# Altium PCB start.PcbDoc
Units mm, origin at the board's own origin, x right, y up, seen from the top; angles counter-clockwise.
Board outline 152.4 x 101.6 mm, 2 copper layers (Top Layer, Bottom Layer); 8 components, 8 nets, 22 pads, 0 vias.
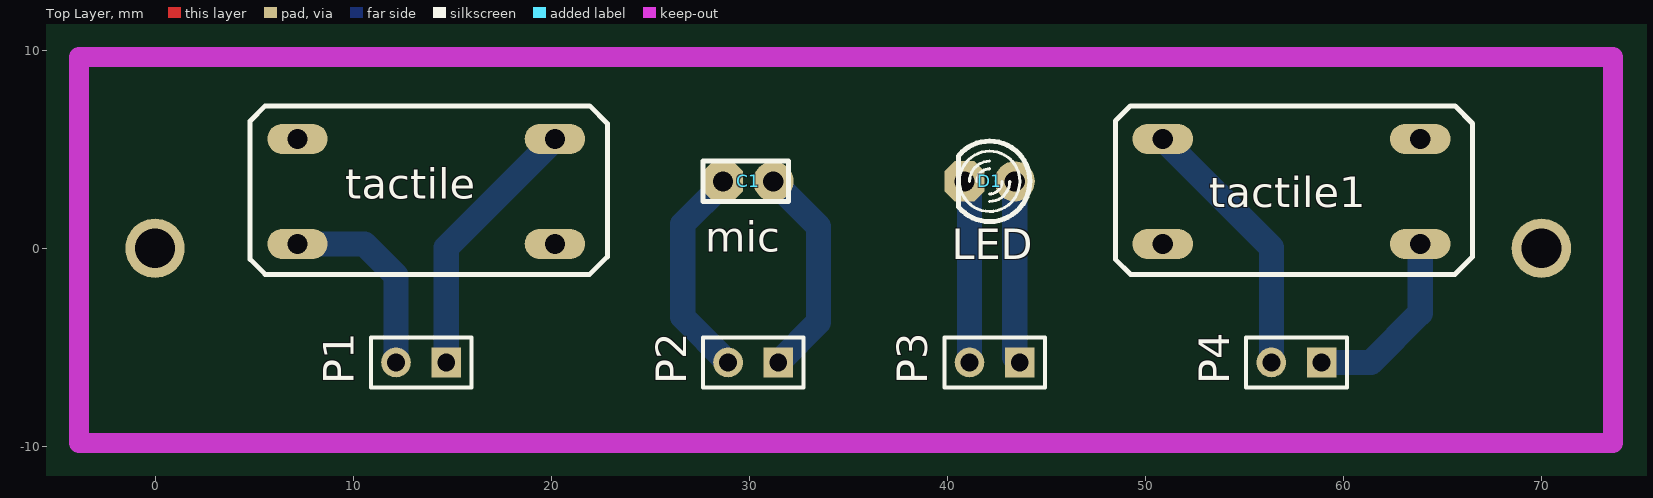
[diagram p0: Top Layer view]
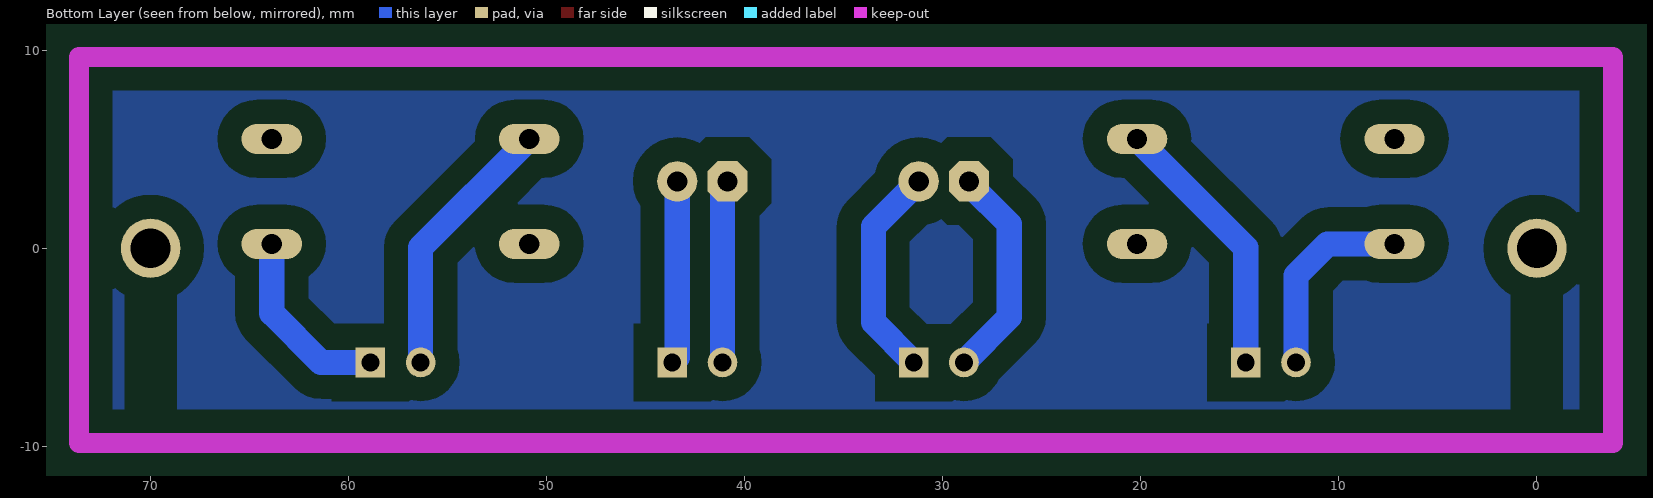
[diagram p1: Bottom Layer view, seen from below]

## Layer stack, top to bottom
Top Layer: signal copper 0.0356
Dielectric: dielectric 0.32, FR-4, Dk 4.8
Bottom Layer: signal copper 0.0356

## Board outline
-12.217,-62.154 140.183,-62.154 140.183,39.446 -12.217,39.446

## Design rules (kind name [scope] priority, off if disabled: settings)
Clearance [All] p1: gap=0.4
PolygonConnect [All] p1: connectstyle=Relief reliefconductorwidth=0.254 reliefentries=4 polygonreliefangle="90 Angle"
RoutingVias [All] p1: holewidth=0.711 width=1.27 viastyle="Through Hole" minholewidth=0.711 minwidth=1.27 maxholewidth=0.711 maxwidth=1.27
SilkscreenOverComponentPads [All] p1: minsilkscreentomaskgap=0.254
SolderMaskExpansion [All] p1: expansion=0.102
Width [All] p1: maxlimit=3 minlimit=0.508 preferedwidth=0.508
27 further rules are at their usual default settings.

## Components (designator, comment, footprint, x,y, rotation, side; value= is the part's Value field where it differs from the comment)
C1 "mic" My_cap100n 29.947,3.378 r0 top
D1 "LED" My_LED3MM 42.139,3.378 r180 top
P1 "Start" HDR1X2 14.707,-5.766 r180 top
P2 "Header 2" HDR1X2 31.471,-5.766 r180 top
P3 "Get_Fire" HDR1X2 43.663,-5.766 r180 top
P4 "Stop" HDR1X2 58.903,-5.766 r180 top
tactile "tactile" tactile 13.691,2.87 r180 top (schematic designator *)
tactile1 "tactile" tactile 57.379,2.87 r180 top (schematic designator *)

## Footprints (in the part's own frame and the unit in brackets; to place one, negate y for a bottom-side part, rotate by r counter-clockwise, add the part's x,y. Pads: shape width x height; smd on the part's side, far side on the other; paste and mask are expansions set on the pad)
HDR1X2 [mm] "Connector; Header; 2 Position"
  rect 1.5x1.5 hole 0.9: 1(0,0)
  round 1.5 hole 0.9: 2(2.54,0)
  silkscreen extent -1.27,-1.27 3.81,1.27
My_cap100n [mil]
  oct 80x80 hole 40: 1(-50,0)
  round 80 hole 40: 2(50,0)
  silkscreen extent -90,-40 80,40
My_LED3MM [mil]
  round 80 hole 40: A(-50,0)
  oct 80x80 hole 40: K(50,0)
  silkscreen extent -80,-80 62,80
tactile [mil]
  oval 120x60 hole 40: 1(-255.91,104.33) 1(255.91,104.33) 2(-255.91,-104.33) 2(255.91,-104.33)
  silkscreen extent -360,-170 350,165

## Part data
C1: library part "Cap ceramic", "CAP-100Nf"
D1: "Typical INFRARED GaAs LED"
P1 P3 P4: library part "Header 2", "Header, 2-Pin"
P2: "Header, 2-Pin"

## Free pads (board coordinates)
  round 3 hole 2: 0(0,0) 1(70,0)

## Nets (pads, with @x,y where several pads share a name; then routed paths per layer and width w, separated by ;. In a path a pad name is that pad's centre, name@x,y a point inside that pad or via, vN(x,y) a via of type N, cw(c..) or ccw(c..) an arc to the next point about the centre after c; other vN are vias at no path point)
Net*_1: P1.1 tactile.2@20.191,5.52 | length 13.6
  Bottom Layer w1.27: P1.1 14.707,0.036 tactile.2@20.191,5.52
Net*_2: P1.2 tactile.1@7.191,0.22 | length 10
  Bottom Layer w1.27: tactile.1@7.191,0.22 10.575,0.22 12.167,-1.372 P1.2
NetC1_1: C1.1 P2.2 | length 10.9
  Bottom Layer w1.27: C1.1 28.677,3.251 26.645,1.219 26.645,-3.48 P2.2
NetC1_2: C1.2 P2.1 | length 10.9
  Bottom Layer w1.27: C1.2 33.503,1.092 33.503,-3.734 P2.1
NetD1_A: D1.A P3.1 | length 9.2
  Bottom Layer w1.27: D1.A 43.409,-5.512 P3.1
NetD1_K: D1.K P3.2 | length 9.2
  Bottom Layer w1.27: D1.K 41.123,3.124 P3.2
NetP4_1: P4.1 tactile1.1@63.879,0.22 | length 9.5
  Bottom Layer w1.27: P4.1 61.392,-5.766 63.879,-3.279 tactile1.1@63.879,0.22
NetP4_2: P4.2 tactile1.2@50.879,5.52 | length 13.6
  Bottom Layer w1.27: tactile1.2@50.879,5.52 56.363,0.036 P4.2
pads on no net: tactile1.1@50.879,0.22 tactile1.2@63.879,5.52 tactile.1@20.191,0.22 tactile.2@7.191,5.52

## Polygon pours and split planes (outlines as drawn)
no net on Bottom Layer "Top Layer-No Net" (solid): 73.609,-9.83 73.812,-9.627 73.812,9.881 -3.607,9.881 -3.835,9.652 -3.835,-9.5 73.609,-9.5

## Keep-outs
Keep-Out Layer:
  lines w1: -3.835,-9.83 73.609,-9.83 73.609,9.652 -3.835,9.652 -3.835,-9.83

## Dimensions
0,0 to 70,0 on Bottom Layer
-3.835,-9.83 to -3.835,9.652 on Top Overlay